# EAGLE board PCB v1.0 (EAGLE 9.7.0)
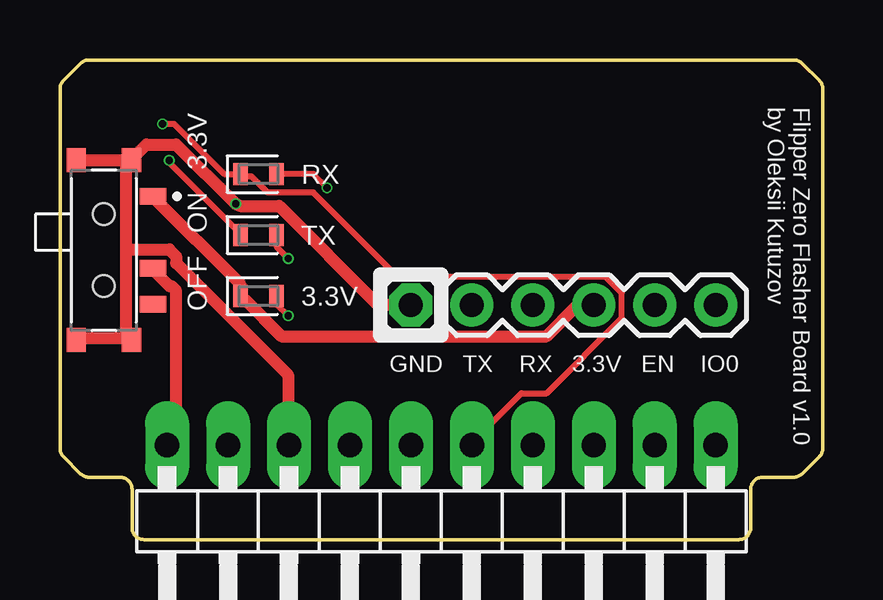
[diagram p0: board, top side]
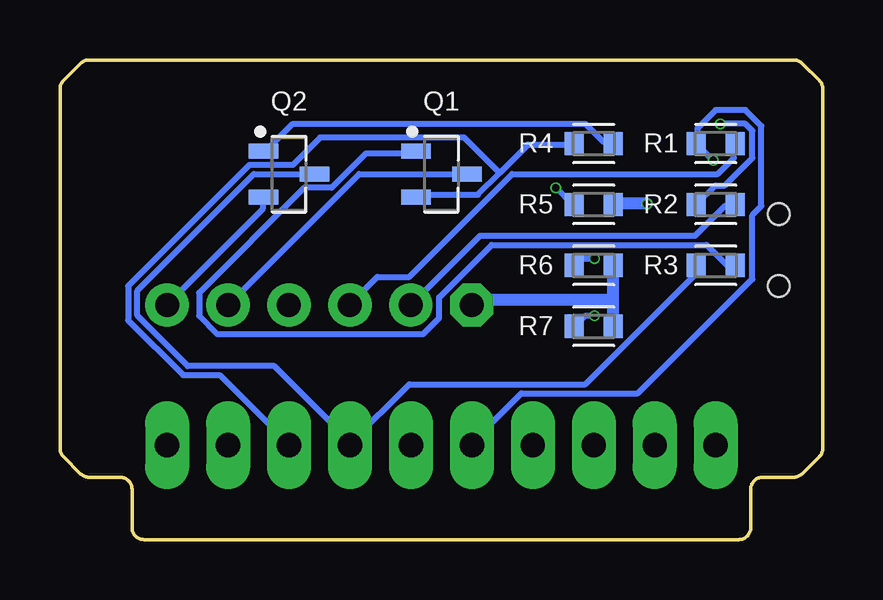
[diagram p1: board, bottom side, seen from below]

Size 31.78 x 20 mm. Coordinates in mm from the lower left corner, seen from the top.
Outline: 29.28,2.6 30.57,2.6 arc45 30.93,2.75 31.63,3.45 arc45 31.78,3.81 31.78,18.79 arc45 31.63,19.15 30.93,19.85 arc45 30.57,20 1.21,20 arc45 0.85,19.85 0.15,19.15 arc45 0,18.79 0,3.81 arc45 0.15,3.45 0.85,2.75 arc45 1.21,2.6 2.5,2.6 arc-90 3,2.1 3,0.5 arc90 3.5,0 28.28,0 arc90 28.78,0.5 28.78,2.1 arc-90 29.28,2.6
Copper layers (1*16): Top / Bottom
Stack-up Default Layer Stack: Top User Defined 0.035mm / Dielectric-1 User Defined 1.6mm / Bottom User Defined 0.035mm
Design rules "jlcpcb-2layers": minimum track width 5mil, minimum drill 0.3mm, track to track 5mil, track to pad 5mil, pad to pad 5mil, via to via 5mil, smd to smd 5mil, copper to edge 0.2mm, drill to drill 6mil, minimum pad ring 10mil, minimum via ring 3mil, stop-mask expansion 4mil, vias tented up to drill 0mil, thermal gap 10mil
Net classes: 0 default: width 0.254 mm; 1 Power: width 0.508 mm

## Footprints (pad centres in the part's own frame; a part is rotated, then mirrored left to right if it is on the bottom)
LEDC1608X55N_FLAT-B = smd 0.612 x 0.912: A 0.75,0; C -0.75,0
1X6-2.54-PLAIN = drill 1 octagon: 1 -6.35,0 | drill 1: 2 -3.81,0; 3 -1.27,0; 4 1.27,0; 5 3.81,0; 6 6.35,0
1X10/90 = drill 1.016 long: 1 -11.43,-3.81; 2 -8.89,-3.81; 3 -6.35,-3.81; 4 -3.81,-3.81; 5 -1.27,-3.81; 6 1.27,-3.81; 7 3.81,-3.81; 8 6.35,-3.81; 9 8.89,-3.81; 10 11.43,-3.81
SOT95P237X112-3N = smd 1.224 x 0.625: 1 -1.064,0.95; 2 -1.064,-0.95; 3 1.064,0
RESC1608X60 = smd 0.799 x 0.974: 1 -0.815,0; 2 0.815,0
SW_MLL1200S = smd 0.7 x 1.1: 1 -2.25,2.05; 2 0.75,2.05; 3 2.25,2.05 | smd 1 x 0.8: G1 -3.75,1.15; G2 3.75,1.15; G3 -3.75,-1.15; G4 3.75,-1.15 | hole 0.9: -1.5,0; 1.5,0

## Placement (x,y rotation side)
D1  LED_BLUE  [LEDC1608X55N_FLAT-B]  8.27,15.24 0 top
D2  LED_BLUE  [LEDC1608X55N_FLAT-B]  8.27,12.7 0 top
D3  LED_BLUE  [LEDC1608X55N_FLAT-B]  8.27,10.16 0 top
ESPF  ESPFLASH-1X6-2.54-PLAIN  [1X6-2.54-PLAIN]  20.97,9.78 0 top
JP1  PINHD-1X10/90  [1X10/90]  15.89,0.12 180 top
Q1  NPN  [SOT95P237X112-3N]  15.89,15.24 0 bottom
Q2  NPN  [SOT95P237X112-3N]  22.24,15.24 0 bottom
R1  470R  [RESC1608X60]  4.46,16.51 0 bottom
R2  470R  [RESC1608X60]  4.46,13.97 0 bottom
R3  12K  [RESC1608X60]  4.46,11.43 0 bottom
R4  12K  [RESC1608X60]  9.54,16.51 0 bottom
R5  1.5K  [RESC1608X60]  9.54,13.97 0 bottom
R6  1.5K  [RESC1608X60]  9.54,11.43 0 bottom
R7  4.7K  [RESC1608X60]  9.54,8.89 0 bottom
SW1  MLL1200S  [SW_MLL1200S]  1.83,12.06 270 top

## Library data of the parts
D1-D3 = LED; CATEGORY: LED; COLOR: BLUE; DESCRIPTION: CHIP LED FLAT; SUB-CATEGORY: CHIP; TYPE: FLAT_TOP
ESPF = SuperHouse-ESPFlash
JP1 = Connector; CATEGORY: CONNECTOR; SUB-CATEGORY: PIN-HEADER
Q1 Q2 = Transistor; CATEGORY: Transistor; SUB-CATEGORY: BJT; TYPE: NPN
R1-R7 = Resistor; CATEGORY: Resistor; SUB-CATEGORY: Fixed
SW1 = MLL1200S; COMMENT: 1437575-1

## Nets
3.3V [Power]: JP1.10 SW1.2
CH_EN: ESPF.5 Q1.3
DTR: JP1.4 Q2.3 R3.1
ESP_3.3V [Power]: D3.C ESPF.4 SW1.1
ESP_RX: ESPF.3 R1.2
ESP_TX: ESPF.2 R2.2
FLIPPER_RX: D1.C JP1.5 R2.1
FLIPPER_TX: D2.C JP1.6 R1.1
GND [Power]: ESPF.1 JP1.8 R5.2 R6.2 R7.2 SW1.G1 SW1.G2 SW1.G3 SW1.G4
GPIO0: ESPF.6 Q2.2
N$2: D1.A R5.1
N$3: Q1.1 R3.2
N$4: D2.A R6.1
N$5: Q2.1 R4.2
N$6: D3.A R7.1
RTS: JP1.3 Q1.2 R4.1

## Tracks (layer width: path | path; a pad name or v marks a point on that pad's centre or on a via)
3.3V
  Top 0.508: SW1.2 3.89,11.24 4.55,10.57 4.65,10.57 4.84,10.38 4.84,4.38 4.46,4 JP1.10
CH_EN
  Bottom 0.254: Q1.3 19.32,15.24 ESPF.5
DTR
  Bottom 0.254: R3.1 5.32,11.43 5.32,11.05 9.89,6.48 17.22,6.48 19.7,4 JP1.4 19.7,4.1 22.84,7.24 26.46,7.24 28.56,9.34 28.56,10.38 23.7,15.24 Q2.3
ESP_3.3V
  Top 0.508: SW1.1 3.89,14.29 7.51,10.67 7.51,10.19 D3.C 7.7,10 9.22,8.48 20.27,8.48 21.51,9.72 22.18,9.72 ESPF.4
ESP_RX
  Bottom 0.254: R1.2 3.7,16.48 3.7,15.91 4.37,15.24 12.94,15.24 17.22,10.95 18.56,10.95 19.7,9.81 ESPF.3
ESP_TX
  Bottom 0.254: ESPF.2 14.27,12.67 5.32,12.67 4.08,13.91 3.7,13.91 R2.2
FLIPPER_RX  (via drill 0.3)
  Top 0.254: v4.27,17.34 4.75,17.34 6.84,15.24 D1.C 7.6,15.14 7.98,15.14 8.65,14.48 10.56,14.48 14.08,10.95 22.75,10.95 23.41,10.29 23.41,9.24 20.27,6.1 19.22,6.1 17.13,4 JP1.5
  Bottom 0.254: v4.27,17.34 3.22,17.34 2.94,17.05 2.94,15.91 4.08,14.76 4.46,14.76 5.22,14 R2.1
FLIPPER_TX  (via drill 0.3)
  Top 0.254: v4.55,15.81 4.55,15.72 7.51,12.76 D2.C
  Bottom 0.254: v4.55,15.81 5.22,16.48 R1.1 5.22,16.57 5.22,17.14 4.46,17.91 3.22,17.91 2.55,17.24 2.55,13.91 2.94,13.53 2.94,10.86 7.7,6.1 12.56,6.1 14.65,4 JP1.6
GND  (via drill 0.3)
  Top 0.508: SW1.G4 0.75,8.38 2.94,8.38 SW1.G2 2.75,8.57 2.75,12.1 | SW1.G1 3.03,15.91 3.6,16.48 4.84,16.48 v7.32,14 7.51,13.91 9.13,13.91 13.22,9.81 14.56,9.81 ESPF.1 | SW1.G3 0.75,15.81 2.75,15.81 SW1.G1 | 2.75,12.1 2.75,15.62 SW1.G1 | 2.75,12.1 4.55,12.1 4.84,11.81 4.84,11.53 9.51,6.86 9.51,4 JP1.8
  Bottom 0.508: 8.75,10 8.75,11.43 R6.2 | 8.75,10 8.75,8.95 R7.2 | 8.75,10 14.37,10 14.56,9.81 ESPF.1 | v7.32,14 8.65,14 R5.2
GPIO0
  Bottom 0.254: Q2.2 23.32,14.29 23.32,13.81 27.32,9.81 ESPF.6
N$2  (via drill 0.3)
  Top 0.254: D1.A 10.56,15.24 v11.13,14.67
  Bottom 0.254: v11.13,14.67 10.37,13.91 R5.1
N$3
  Bottom 0.254: R3.2 3.98,11.43 4.84,12.29 13.79,12.29 15.99,10.1 15.99,9.24 16.65,8.57 25.23,8.57 25.99,9.34 25.99,10.29 21.61,14.67 20.46,14.67 19.03,16.1 17.03,16.1 Q1.1
N$4  (via drill 0.3)
  Top 0.254: v9.51,11.72 9.03,12.19 9.03,12.67 D2.A
  Bottom 0.254: v9.51,11.72 9.98,11.72 10.27,11.43 R6.1
N$5
  Bottom 0.254: R4.2 8.75,16.57 9.13,16.57 9.89,17.34 22.08,17.34 23.22,16.19 Q2.1
N$6  (via drill 0.3)
  Top 0.254: v9.51,9.34 9.03,9.81 9.03,10.1 D3.A
  Bottom 0.254: v9.51,9.34 9.89,9.34 10.27,8.95 R7.1
RTS
  Bottom 0.254: 13.46,15.29 14.37,14.38 16.94,14.38 Q1.2 | 13.46,15.29 12.27,16.48 10.37,16.48 R4.1 | 13.46,15.29 14.94,16.76 20.94,16.76 22.08,15.62 23.89,15.62 28.94,10.57 28.94,9.14 26.65,6.86 25.13,6.86 22.27,4 JP1.3

## Text on the board
tNames: Flipper Zero Flasher Board v1.0 / by Oleksii Kutuzov | RX | TX | OFF ON 3.3V | 3.3V | GND TX RX 3.3V EN IO0